# EAGLE board seven_seg (EAGLE 9.6.2), part 1 of 3
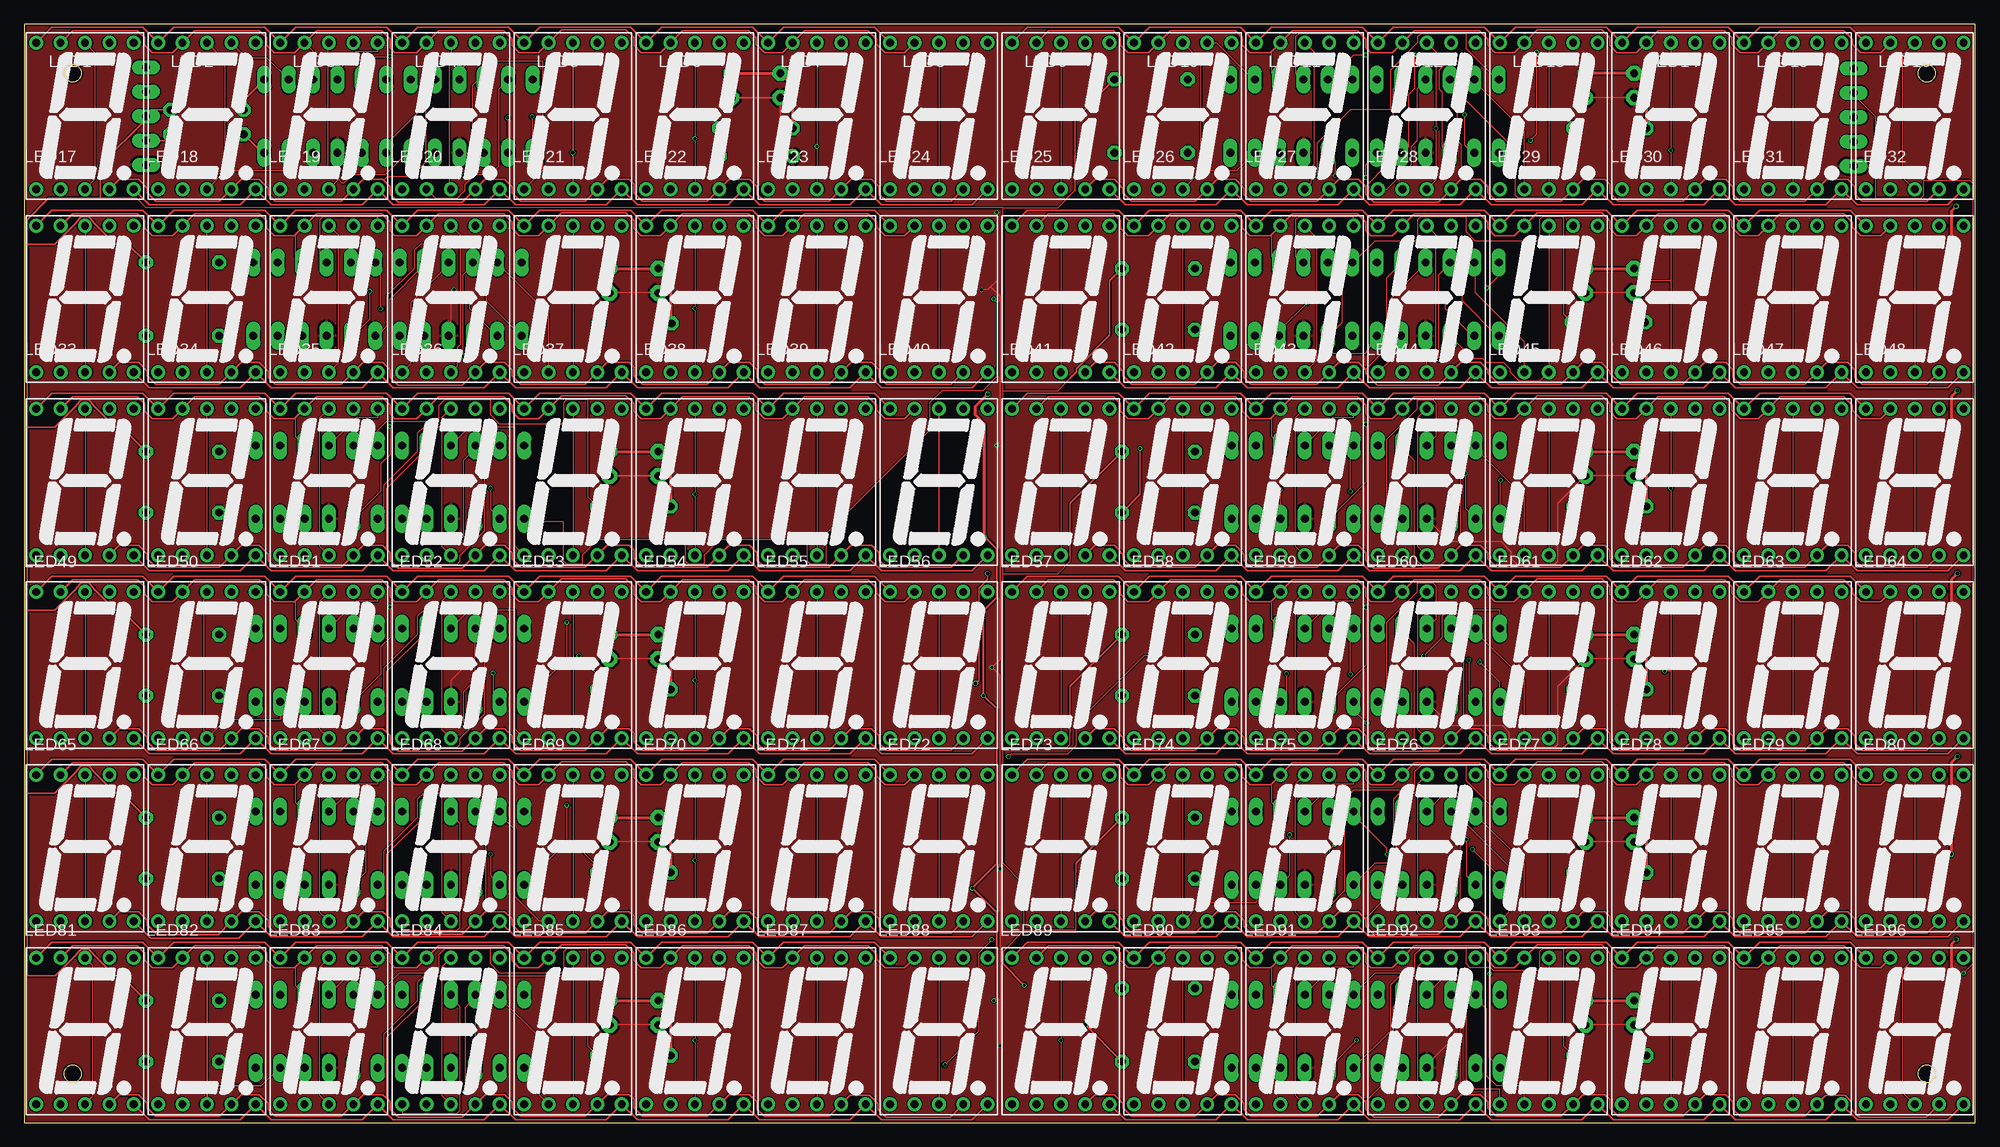
[diagram p0: board, top side]
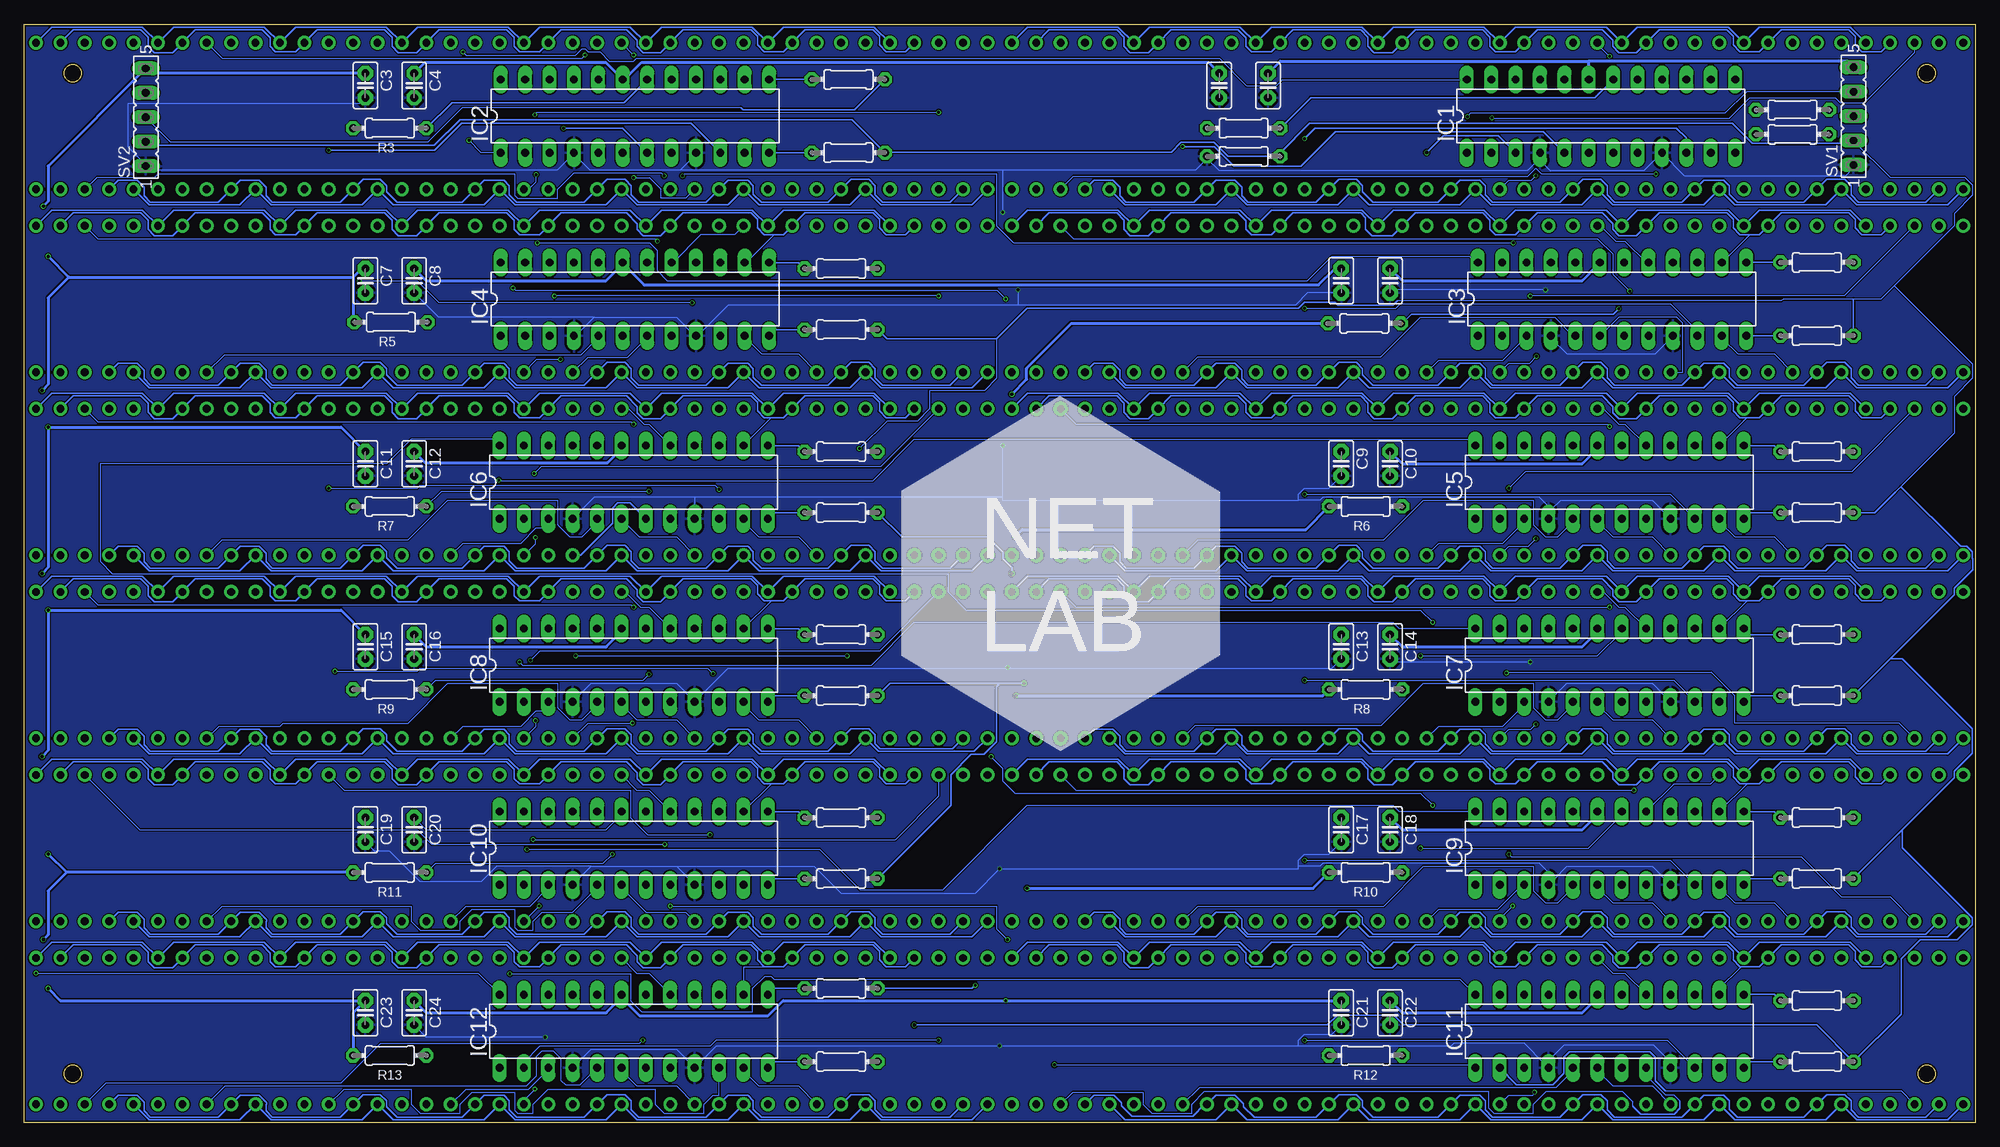
[diagram p1: board, bottom side, seen from below]

Size 203.18 x 114.35 mm. Coordinates in mm from the lower left corner, seen from the top.
Outline: 0,0 203.18,0 203.18,114.35 0,114.35 0,0
Outline: circle at 5.08,109.22 radius 0.89
Outline: circle at 5.08,5.08 radius 0.89
Outline: circle at 198.12,5.08 radius 0.89
Outline: circle at 198.12,109.22 radius 0.89
Copper layers (1*16): Top 0.035mm / dielectric 1.6mm / Bottom 0.035mm
Design rules "jlcpcb-2layers": minimum track width 5mil, minimum drill 0.3mm, track to track 5mil, track to pad 5mil, pad to pad 5mil, via to via 5mil, smd to smd 5mil, copper to edge 0.2mm, drill to drill 6mil, minimum pad ring 10mil, minimum via ring 3mil, stop-mask expansion 4mil, vias tented up to drill 0mil, thermal gap 10mil

## Footprints (pad centres in the part's own frame; a part is rotated, then mirrored left to right if it is on the bottom)
C2.5-2 = drill 0.813 pad 1.6 octagon: 1 -1.27,0; 2 1.27,0
DIL24-3 = drill 0.813 long: 1 -13.97,-3.81; 2 -11.43,-3.81; 3 -8.89,-3.81; 4 -6.35,-3.81; 5 -3.81,-3.81; 6 -1.27,-3.81; 7 1.27,-3.81; 8 3.81,-3.81; 9 6.35,-3.81; 10 8.89,-3.81; 11 11.43,-3.81; 12 13.97,-3.81; 13 13.97,3.81; 14 11.43,3.81; 15 8.89,3.81; 16 6.35,3.81; 17 3.81,3.81; 18 1.27,3.81; 19 -1.27,3.81; 20 -3.81,3.81; 21 -6.35,3.81; 22 -8.89,3.81; 23 -11.43,3.81; 24 -13.97,3.81
SA52-11 = drill 0.8: 1 -5.08,-7.62; 2 -2.54,-7.62; 3 0,-7.62; 4 2.54,-7.62; 5 5.08,-7.62; 6 5.08,7.62; 7 2.54,7.62; 8 0,7.62; 9 -2.54,7.62; 10 -5.08,7.62
0204/7 = drill 0.813 octagon: 1 -3.81,0; 2 3.81,0
FE05-1 = drill 0.813 long: 1 -5.08,0; 2 -2.54,0; 3 0,0; 4 2.54,0; 5 5.08,0

## Placement (x,y rotation side)
C1  10uF  [C2.5-2]  78.74,107.95 270 bottom
C2  100nF  [C2.5-2]  73.66,107.95 270 bottom
C3  10uF  [C2.5-2]  167.64,107.95 270 bottom
C4  100nF  [C2.5-2]  162.56,107.95 270 bottom
C5  10uF  [C2.5-2]  66.04,87.63 270 bottom
C6  100nF  [C2.5-2]  60.96,87.63 270 bottom
C7  10uF  [C2.5-2]  167.64,87.63 270 bottom
C8  100nF  [C2.5-2]  162.56,87.63 270 bottom
C9  10uF  [C2.5-2]  66.04,68.58 270 bottom
C10  100nF  [C2.5-2]  60.96,68.58 270 bottom
C11  10uF  [C2.5-2]  167.64,68.58 270 bottom
C12  100nF  [C2.5-2]  162.56,68.58 270 bottom
C13  10uF  [C2.5-2]  66.04,49.53 270 bottom
C14  100nF  [C2.5-2]  60.96,49.53 270 bottom
C15  10uF  [C2.5-2]  167.64,49.53 270 bottom
C16  100nF  [C2.5-2]  162.56,49.53 270 bottom
C17  10uF  [C2.5-2]  66.04,30.48 270 bottom
C18  100nF  [C2.5-2]  60.96,30.48 270 bottom
C19  10uF  [C2.5-2]  167.64,30.48 270 bottom
C20  100nF  [C2.5-2]  162.56,30.48 270 bottom
C21  10uF  [C2.5-2]  66.04,11.43 270 bottom
C22  100nF  [C2.5-2]  60.96,11.43 270 bottom
C23  10uF  [C2.5-2]  167.64,11.43 270 bottom
C24  100nF  [C2.5-2]  162.56,11.43 270 bottom
IC1  MAX7219CNG  [DIL24-3]  38.99,104.76 0 bottom
IC2  MAX7219CNG  [DIL24-3]  139.57,104.76 0 bottom
IC3  MAX7219CNG  [DIL24-3]  37.85,85.71 0 bottom
IC4  MAX7219CNG  [DIL24-3]  139.57,85.71 0 bottom
IC5  MAX7219CNG  [DIL24-3]  38.1,66.66 0 bottom
IC6  MAX7219CNG  [DIL24-3]  139.7,66.66 0 bottom
IC7  MAX7219CNG  [DIL24-3]  38.1,47.61 0 bottom
IC8  MAX7219CNG  [DIL24-3]  139.7,47.61 0 bottom
IC9  MAX7219CNG  [DIL24-3]  38.1,28.56 0 bottom
IC10  MAX7219CNG  [DIL24-3]  139.7,28.56 0 bottom
IC11  MAX7219CNG  [DIL24-3]  38.1,9.51 0 bottom
IC12  MAX7219CNG  [DIL24-3]  139.7,9.51 0 bottom
LED1  7-SEG_SA52-11  [SA52-11]  6.35,104.78 0 top
LED2  7-SEG_SA52-11  [SA52-11]  19.05,104.78 0 top
LED3  7-SEG_SA52-11  [SA52-11]  31.75,104.78 0 top
LED4  7-SEG_SA52-11  [SA52-11]  44.45,104.78 0 top
LED5  7-SEG_SA52-11  [SA52-11]  57.15,104.78 0 top
LED6  7-SEG_SA52-11  [SA52-11]  69.85,104.78 0 top
LED7  7-SEG_SA52-11  [SA52-11]  82.55,104.78 0 top
LED8  7-SEG_SA52-11  [SA52-11]  95.25,104.78 0 top
LED9  7-SEG_SA52-11  [SA52-11]  107.95,104.78 0 top
LED10  7-SEG_SA52-11  [SA52-11]  120.65,104.78 0 top
LED11  7-SEG_SA52-11  [SA52-11]  133.35,104.78 0 top
LED12  7-SEG_SA52-11  [SA52-11]  146.05,104.78 0 top
LED13  7-SEG_SA52-11  [SA52-11]  158.75,104.78 0 top
LED14  7-SEG_SA52-11  [SA52-11]  171.45,104.78 0 top
LED15  7-SEG_SA52-11  [SA52-11]  184.15,104.78 0 top
LED16  7-SEG_SA52-11  [SA52-11]  196.85,104.78 0 top
LED17  7-SEG_SA52-11  [SA52-11]  6.35,85.72 0 top
LED18  7-SEG_SA52-11  [SA52-11]  19.05,85.72 0 top
LED19  7-SEG_SA52-11  [SA52-11]  31.75,85.72 0 top
LED20  7-SEG_SA52-11  [SA52-11]  44.45,85.72 0 top
LED21  7-SEG_SA52-11  [SA52-11]  57.15,85.72 0 top
LED22  7-SEG_SA52-11  [SA52-11]  69.85,85.72 0 top
LED23  7-SEG_SA52-11  [SA52-11]  82.55,85.72 0 top
LED24  7-SEG_SA52-11  [SA52-11]  95.25,85.72 0 top
LED25  7-SEG_SA52-11  [SA52-11]  107.95,85.72 0 top
LED26  7-SEG_SA52-11  [SA52-11]  120.65,85.72 0 top
LED27  7-SEG_SA52-11  [SA52-11]  133.35,85.72 0 top
LED28  7-SEG_SA52-11  [SA52-11]  146.05,85.72 0 top
LED29  7-SEG_SA52-11  [SA52-11]  158.75,85.72 0 top
LED30  7-SEG_SA52-11  [SA52-11]  171.45,85.72 0 top
LED31  7-SEG_SA52-11  [SA52-11]  184.15,85.72 0 top
LED32  7-SEG_SA52-11  [SA52-11]  196.85,85.72 0 top
LED33  7-SEG_SA52-11  [SA52-11]  6.35,66.67 0 top
LED34  7-SEG_SA52-11  [SA52-11]  19.05,66.67 0 top
LED35  7-SEG_SA52-11  [SA52-11]  31.75,66.67 0 top
LED36  7-SEG_SA52-11  [SA52-11]  44.45,66.67 0 top
LED37  7-SEG_SA52-11  [SA52-11]  57.15,66.67 0 top
LED38  7-SEG_SA52-11  [SA52-11]  69.85,66.67 0 top
LED39  7-SEG_SA52-11  [SA52-11]  82.55,66.67 0 top
LED40  7-SEG_SA52-11  [SA52-11]  95.25,66.67 0 top
LED41  7-SEG_SA52-11  [SA52-11]  107.95,66.67 0 top
LED42  7-SEG_SA52-11  [SA52-11]  120.65,66.67 0 top
LED43  7-SEG_SA52-11  [SA52-11]  133.35,66.67 0 top
LED44  7-SEG_SA52-11  [SA52-11]  146.05,66.67 0 top
LED45  7-SEG_SA52-11  [SA52-11]  158.75,66.67 0 top
LED46  7-SEG_SA52-11  [SA52-11]  171.45,66.67 0 top
LED47  7-SEG_SA52-11  [SA52-11]  184.15,66.67 0 top
LED48  7-SEG_SA52-11  [SA52-11]  196.85,66.67 0 top
LED49  7-SEG_SA52-11  [SA52-11]  6.35,47.62 0 top
LED50  7-SEG_SA52-11  [SA52-11]  19.05,47.62 0 top
LED51  7-SEG_SA52-11  [SA52-11]  31.75,47.62 0 top
LED52  7-SEG_SA52-11  [SA52-11]  44.45,47.62 0 top
LED53  7-SEG_SA52-11  [SA52-11]  57.15,47.62 0 top
LED54  7-SEG_SA52-11  [SA52-11]  69.85,47.62 0 top
LED55  7-SEG_SA52-11  [SA52-11]  82.55,47.62 0 top
LED56  7-SEG_SA52-11  [SA52-11]  95.25,47.62 0 top
LED57  7-SEG_SA52-11  [SA52-11]  107.95,47.62 0 top
LED58  7-SEG_SA52-11  [SA52-11]  120.65,47.62 0 top
LED59  7-SEG_SA52-11  [SA52-11]  133.35,47.62 0 top
LED60  7-SEG_SA52-11  [SA52-11]  146.05,47.62 0 top
LED61  7-SEG_SA52-11  [SA52-11]  158.75,47.62 0 top
LED62  7-SEG_SA52-11  [SA52-11]  171.45,47.62 0 top
LED63  7-SEG_SA52-11  [SA52-11]  184.15,47.62 0 top
LED64  7-SEG_SA52-11  [SA52-11]  196.85,47.62 0 top
LED65  7-SEG_SA52-11  [SA52-11]  6.35,28.57 0 top
LED66  7-SEG_SA52-11  [SA52-11]  19.05,28.57 0 top
LED67  7-SEG_SA52-11  [SA52-11]  31.75,28.57 0 top
LED68  7-SEG_SA52-11  [SA52-11]  44.45,28.57 0 top
LED69  7-SEG_SA52-11  [SA52-11]  57.15,28.57 0 top
LED70  7-SEG_SA52-11  [SA52-11]  69.85,28.57 0 top
LED71  7-SEG_SA52-11  [SA52-11]  82.55,28.57 0 top
LED72  7-SEG_SA52-11  [SA52-11]  95.25,28.57 0 top
LED73  7-SEG_SA52-11  [SA52-11]  107.95,28.57 0 top
LED74  7-SEG_SA52-11  [SA52-11]  120.65,28.57 0 top
LED75  7-SEG_SA52-11  [SA52-11]  133.35,28.57 0 top
LED76  7-SEG_SA52-11  [SA52-11]  146.05,28.57 0 top
LED77  7-SEG_SA52-11  [SA52-11]  158.75,28.57 0 top
LED78  7-SEG_SA52-11  [SA52-11]  171.45,28.57 0 top
LED79  7-SEG_SA52-11  [SA52-11]  184.15,28.57 0 top
LED80  7-SEG_SA52-11  [SA52-11]  196.85,28.57 0 top
LED81  7-SEG_SA52-11  [SA52-11]  6.35,9.53 0 top
LED82  7-SEG_SA52-11  [SA52-11]  19.05,9.53 0 top
LED83  7-SEG_SA52-11  [SA52-11]  31.75,9.53 0 top
LED84  7-SEG_SA52-11  [SA52-11]  44.45,9.53 0 top
LED85  7-SEG_SA52-11  [SA52-11]  57.15,9.53 0 top
LED86  7-SEG_SA52-11  [SA52-11]  69.85,9.53 0 top
LED87  7-SEG_SA52-11  [SA52-11]  82.55,9.53 0 top
LED88  7-SEG_SA52-11  [SA52-11]  95.25,9.53 0 top
LED89  7-SEG_SA52-11  [SA52-11]  107.95,9.53 0 top
LED90  7-SEG_SA52-11  [SA52-11]  120.65,9.53 0 top
LED91  7-SEG_SA52-11  [SA52-11]  133.35,9.53 0 top
LED92  7-SEG_SA52-11  [SA52-11]  146.05,9.53 0 top
LED93  7-SEG_SA52-11  [SA52-11]  158.75,9.53 0 top
LED94  7-SEG_SA52-11  [SA52-11]  171.45,9.53 0 top
LED95  7-SEG_SA52-11  [SA52-11]  184.15,9.53 0 top
LED96  7-SEG_SA52-11  [SA52-11]  196.85,9.53 0 top
R1  12k  [0204/7]  76.2,103.5 0 bottom
R2  12k  [0204/7]  76.2,100.58 0 bottom
R3  12k  [0204/7]  165.1,103.5 0 bottom
R4  12k  [0204/7]  63.63,83.19 0 bottom
R5  12k  [0204/7]  164.97,83.31 0 bottom
R6  12k  [0204/7]  63.5,64.14 0 bottom
R7  12k  [0204/7]  165.1,64.14 0 bottom
R8  12k  [0204/7]  63.5,45.09 0 bottom
R9  12k  [0204/7]  165.1,45.09 0 bottom
R10  12k  [0204/7]  63.5,26.04 0 bottom
R11  12k  [0204/7]  165.1,26.04 0 bottom
R12  12k  [0204/7]  63.5,6.99 0 bottom
R13  12k  [0204/7]  165.1,6.99 0 bottom
R14  880  [0204/7]  19.05,105.41 0 bottom
R15  880  [0204/7]  19.05,102.87 0 bottom
R16  880  [0204/7]  117.35,108.58 0 bottom
R17  880  [0204/7]  117.35,100.97 0 bottom
R18  880  [0204/7]  16.51,89.53 0 bottom
R19  880  [0204/7]  16.51,81.92 0 bottom
R20  880  [0204/7]  118.11,88.9 0 bottom
R21  880  [0204/7]  118.11,82.55 0 bottom
R22  880  [0204/7]  16.51,69.85 0 bottom
R23  880  [0204/7]  16.51,63.5 0 bottom
R24  880  [0204/7]  118.11,69.85 0 bottom
R25  880  [0204/7]  118.11,63.5 0 bottom
R26  880  [0204/7]  16.51,50.8 0 bottom
R27  880  [0204/7]  16.51,44.45 0 bottom
R28  880  [0204/7]  118.11,50.8 0 bottom
R29  880  [0204/7]  118.11,44.45 0 bottom
R30  880  [0204/7]  16.51,31.75 0 bottom
R31  880  [0204/7]  16.51,25.4 0 bottom
R32  880  [0204/7]  118.11,31.75 0 bottom
R33  880  [0204/7]  118.11,25.4 0 bottom
R34  880  [0204/7]  16.51,12.7 0 bottom
R35  880  [0204/7]  16.51,6.35 0 bottom
R36  880  [0204/7]  118.11,13.97 0 bottom
R37  880  [0204/7]  118.11,6.35 0 bottom
SV1  [FE05-1]  12.7,104.76 90 bottom
SV2  [FE05-1]  190.5,104.65 90 bottom

## Library data of the parts
C1-C24 = capacitor-wima
IC1-IC12 = maxim; MF: MAXIM; MPN: MAX7219CNG; OC_FARNELL: 1523914; OC_NEWARK: 34C4018
LED1-LED96 = display-kingbright; OC_FARNELL: unknown; OC_NEWARK: unknown
R1-R37 = rcl; SPICEPREFIX: R
SV1 SV2 = con-lsta; OC_FARNELL: unknown; OC_NEWARK: unknown

## Nets
CLK: R14.2 R16.2 R18.2 R20.2 R22.2 R24.2 R26.2 R28.2 R30.2 R32.2 R34.2 R36.2 SV1.3 SV2.3
DIN: IC1.1 SV1.4
GND: C1.2 C2.2 C3.2 C4.2 C5.2 C6.2 C7.2 C8.2 C9.2 C10.2 C11.2 C12.2 C13.2 C14.2 C15.2 C16.2 C17.2 C18.2 C19.2 C20.2 C21.2 C22.2 C23.2 C24.2 IC1.4 IC1.9 IC2.4 IC2.9 IC3.4 IC3.9 IC4.4 IC4.9 IC5.4 IC5.9 IC6.4 IC6.9 IC7.4 IC7.9 IC8.4 IC8.9 IC9.4 IC9.9 IC10.4 IC10.9 IC11.4 IC11.9 IC12.4 IC12.9 R2.1 SV1.1 SV2.1
LOAD: R2.2 R15.2 R17.2 R19.2 R21.2 R23.2 R25.2 R27.2 R29.2 R31.2 R33.2 R35.2 R37.2 SV1.2 SV2.2
N$1: IC1.2 LED1.3 LED1.8
N$2: IC1.11 LED2.3 LED2.8
N$3: IC1.6 LED3.3 LED3.8
N$4: IC1.7 LED4.3 LED4.8
N$5: IC1.3 LED5.3 LED5.8
N$6: IC1.10 LED6.3 LED6.8
N$7: IC1.5 LED7.3 LED7.8
N$8: IC1.8 LED8.3 LED8.8
N$9: IC1.15 LED1.9 LED2.9 LED3.9 LED4.9 LED5.9 LED6.9 LED7.9 LED8.9
N$10: IC2.18 R3.2
N$11: IC2.22 LED9.5 LED10.5 LED11.5 LED12.5 LED13.5 LED14.5 LED15.5 LED16.5
N$12: IC1.13 R14.1
N$13: IC1.12 R15.1
N$14: IC2.13 R16.1
N$15: IC2.2 LED9.3 LED9.8
N$16: IC1.18 R1.2
N$17: IC1.14 LED1.7 LED2.7 LED3.7 LED4.7 LED5.7 LED6.7 LED7.7 LED8.7
N$18: IC1.22 LED1.5 LED2.5 LED3.5 LED4.5 LED5.5 LED6.5 LED7.5 LED8.5
N$19: IC1.16 LED1.6 LED2.6 LED3.6 LED4.6 LED5.6 LED6.6 LED7.6 LED8.6
N$20: IC1.20 LED1.4 LED2.4 LED3.4 LED4.4 LED5.4 LED6.4 LED7.4 LED8.4
N$21: IC1.23 LED1.2 LED2.2 LED3.2 LED4.2 LED5.2 LED6.2 LED7.2 LED8.2
N$22: IC1.21 LED1.1 LED2.1 LED3.1 LED4.1 LED5.1 LED6.1 LED7.1 LED8.1
N$23: IC2.11 LED10.3 LED10.8
N$24: IC1.17 LED1.10 LED2.10 LED3.10 LED4.10 LED5.10 LED6.10 LED7.10 LED8.10
N$25: IC2.6 LED11.3 LED11.8
N$26: IC2.7 LED12.3 LED12.8
N$27: IC2.3 LED13.3 LED13.8
N$28: IC2.10 LED14.3 LED14.8
N$29: IC2.5 LED15.3 LED15.8
N$30: IC2.8 LED16.3 LED16.8
N$31: IC2.14 LED9.7 LED10.7 LED11.7 LED12.7 LED13.7 LED14.7 LED15.7 LED16.7
N$32: IC2.16 LED9.6 LED10.6 LED11.6 LED12.6 LED13.6 LED14.6 LED15.6 LED16.6
N$33: IC2.20 LED9.4 LED10.4 LED11.4 LED12.4 LED13.4 LED14.4 LED15.4 LED16.4
N$34: IC2.23 LED9.2 LED10.2 LED11.2 LED12.2 LED13.2 LED14.2 LED15.2 LED16.2
N$35: IC2.21 LED9.1 LED10.1 LED11.1 LED12.1 LED13.1 LED14.1 LED15.1 LED16.1
N$36: IC2.17 LED9.10 LED10.10 LED11.10 LED12.10 LED13.10 LED14.10 LED15.10 LED16.10
N$37: IC2.15 LED9.9 LED10.9 LED11.9 LED12.9 LED13.9 LED14.9 LED15.9 LED16.9
N$38: IC2.24 IC3.1
N$39: IC10.3 LED77.3 LED77.8
N$40: IC2.12 R17.1
N$41: IC3.13 R18.1
N$42: IC1.24 IC2.1
N$43: IC3.12 R19.1
N$44: IC4.13 R20.1
N$45: IC4.12 R21.1
N$46: IC3.18 R4.2
N$47: IC3.22 LED17.5 LED18.5 LED19.5 LED20.5 LED21.5 LED22.5 LED23.5 LED24.5
N$48: IC3.2 LED17.3 LED17.8
N$49: IC3.11 LED18.3 LED18.8
N$50: IC3.6 LED19.3 LED19.8
N$51: IC3.7 LED20.3 LED20.8
N$52: IC3.3 LED21.3 LED21.8
N$53: IC3.10 LED22.3 LED22.8
N$54: IC3.5 LED23.3 LED23.8
N$55: IC3.8 LED24.3 LED24.8
N$56: IC3.14 LED17.7 LED18.7 LED19.7 LED20.7 LED21.7 LED22.7 LED23.7 LED24.7
N$57: IC3.16 LED17.6 LED18.6 LED19.6 LED20.6 LED21.6 LED22.6 LED23.6 LED24.6
N$58: IC3.20 LED17.4 LED18.4 LED19.4 LED20.4 LED21.4 LED22.4 LED23.4 LED24.4
N$59: IC3.23 LED17.2 LED18.2 LED19.2 LED20.2 LED21.2 LED22.2 LED23.2 LED24.2
N$60: IC3.21 LED17.1 LED18.1 LED19.1 LED20.1 LED21.1 LED22.1 LED23.1 LED24.1
N$61: IC3.17 LED17.10 LED18.10 LED19.10 LED20.10 LED21.10 LED22.10 LED23.10 LED24.10
N$62: IC3.15 LED17.9 LED18.9 LED19.9 LED20.9 LED21.9 LED22.9 LED23.9 LED24.9
N$63: IC5.13 R22.1
N$64: IC5.12 R23.1
N$65: IC6.13 R24.1
N$66: IC4.18 R5.2
N$67: IC3.24 IC4.1
N$68: IC4.22 LED25.5 LED26.5 LED27.5 LED28.5 LED29.5 LED30.5 LED31.5 LED32.5
N$69: IC4.2 LED25.3 LED25.8
N$70: IC4.11 LED26.3 LED26.8
N$71: IC4.6 LED27.3 LED27.8
N$72: IC4.7 LED28.3 LED28.8
N$73: IC4.3 LED29.3 LED29.8
N$74: IC4.10 LED30.3 LED30.8
N$75: IC4.5 LED31.3 LED31.8
N$76: IC4.8 LED32.3 LED32.8
N$77: IC4.14 LED25.7 LED26.7 LED27.7 LED28.7 LED29.7 LED30.7 LED31.7 LED32.7
N$78: IC4.16 LED25.6 LED26.6 LED27.6 LED28.6 LED29.6 LED30.6 LED31.6 LED32.6
N$79: IC4.20 LED25.4 LED26.4 LED27.4 LED28.4 LED29.4 LED30.4 LED31.4 LED32.4
N$80: IC4.23 LED25.2 LED26.2 LED27.2 LED28.2 LED29.2 LED30.2 LED31.2 LED32.2
N$81: IC4.21 LED25.1 LED26.1 LED27.1 LED28.1 LED29.1 LED30.1 LED31.1 LED32.1
N$82: IC4.17 LED25.10 LED26.10 LED27.10 LED28.10 LED29.10 LED30.10 LED31.10 LED32.10
N$83: IC4.15 LED25.9 LED26.9 LED27.9 LED28.9 LED29.9 LED30.9 LED31.9 LED32.9
N$84: IC6.12 R25.1
N$85: IC4.24 IC5.1
N$86: IC7.13 R26.1
N$87: IC7.12 R27.1
N$88: IC8.13 R28.1
N$89: IC8.12 R29.1
N$90: IC9.13 R30.1
N$91: IC5.18 R6.2
N$92: IC5.22 LED33.5 LED34.5 LED35.5 LED36.5 LED37.5 LED38.5 LED39.5 LED40.5
N$93: IC5.2 LED33.3 LED33.8
N$94: IC5.11 LED34.3 LED34.8
N$95: IC5.6 LED35.3 LED35.8
N$96: IC5.7 LED36.3 LED36.8
N$97: IC5.3 LED37.3 LED37.8
N$98: IC5.10 LED38.3 LED38.8
N$99: IC5.5 LED39.3 LED39.8
N$100: IC5.8 LED40.3 LED40.8
N$101: IC5.14 LED33.7 LED34.7 LED35.7 LED36.7 LED37.7 LED38.7 LED39.7 LED40.7
N$102: IC5.16 LED33.6 LED34.6 LED35.6 LED36.6 LED37.6 LED38.6 LED39.6 LED40.6
N$103: IC5.20 LED33.4 LED34.4 LED35.4 LED36.4 LED37.4 LED38.4 LED39.4 LED40.4
N$104: IC5.23 LED33.2 LED34.2 LED35.2 LED36.2 LED37.2 LED38.2 LED39.2 LED40.2
N$105: IC5.21 LED33.1 LED34.1 LED35.1 LED36.1 LED37.1 LED38.1 LED39.1 LED40.1
N$106: IC5.17 LED33.10 LED34.10 LED35.10 LED36.10 LED37.10 LED38.10 LED39.10 LED40.10
N$107: IC5.15 LED33.9 LED34.9 LED35.9 LED36.9 LED37.9 LED38.9 LED39.9 LED40.9
N$108: IC9.12 R31.1
N$109: IC5.24 IC6.1
N$110: IC10.13 R32.1
N$111: IC10.12 R33.1
N$112: IC11.13 R34.1
N$113: IC11.12 R35.1
N$114: IC12.13 R36.1
N$115: IC6.18 R7.2
N$116: IC6.22 LED41.5 LED42.5 LED43.5 LED44.5 LED45.5 LED46.5 LED47.5 LED48.5
N$117: IC6.2 LED41.3 LED41.8
N$118: IC6.11 LED42.3 LED42.8
N$119: IC6.6 LED43.3 LED43.8
N$120: IC6.7 LED44.3 LED44.8
N$121: IC6.3 LED45.3 LED45.8
N$122: IC6.10 LED46.3 LED46.8
N$123: IC6.5 LED47.3 LED47.8
N$124: IC6.8 LED48.3 LED48.8
N$125: IC6.14 LED41.7 LED42.7 LED43.7 LED44.7 LED45.7 LED46.7 LED47.7 LED48.7
N$126: IC6.16 LED41.6 LED42.6 LED43.6 LED44.6 LED45.6 LED46.6 LED47.6 LED48.6
N$127: IC6.20 LED41.4 LED42.4 LED43.4 LED44.4 LED45.4 LED46.4 LED47.4 LED48.4
N$128: IC6.23 LED41.2 LED42.2 LED43.2 LED44.2 LED45.2 LED46.2 LED47.2 LED48.2
N$129: IC6.21 LED41.1 LED42.1 LED43.1 LED44.1 LED45.1 LED46.1 LED47.1 LED48.1
N$130: IC6.17 LED41.10 LED42.10 LED43.10 LED44.10 LED45.10 LED46.10 LED47.10 LED48.10
N$131: IC6.15 LED41.9 LED42.9 LED43.9 LED44.9 LED45.9 LED46.9 LED47.9 LED48.9
N$132: IC12.12 R37.1
N$133: IC6.24 IC7.1
N$139: IC7.18 R8.2
N$140: IC7.22 LED49.5 LED50.5 LED51.5 LED52.5 LED53.5 LED54.5 LED55.5 LED56.5
N$141: IC7.2 LED49.3 LED49.8
N$142: IC7.11 LED50.3 LED50.8
N$143: IC7.6 LED51.3 LED51.8
N$144: IC7.7 LED52.3 LED52.8
N$145: IC7.3 LED53.3 LED53.8
N$146: IC7.10 LED54.3 LED54.8
N$147: IC7.5 LED55.3 LED55.8
N$148: IC7.8 LED56.3 LED56.8
N$149: IC7.14 LED49.7 LED50.7 LED51.7 LED52.7 LED53.7 LED54.7 LED55.7 LED56.7
N$150: IC7.16 LED49.6 LED50.6 LED51.6 LED52.6 LED53.6 LED54.6 LED55.6 LED56.6
N$151: IC7.20 LED49.4 LED50.4 LED51.4 LED52.4 LED53.4 LED54.4 LED55.4 LED56.4
N$152: IC7.23 LED49.2 LED50.2 LED51.2 LED52.2 LED53.2 LED54.2 LED55.2 LED56.2
N$153: IC7.21 LED49.1 LED50.1 LED51.1 LED52.1 LED53.1 LED54.1 LED55.1 LED56.1
N$154: IC7.17 LED49.10 LED50.10 LED51.10 LED52.10 LED53.10 LED54.10 LED55.10 LED56.10
N$155: IC7.15 LED49.9 LED50.9 LED51.9 LED52.9 LED53.9 LED54.9 LED55.9 LED56.9
N$157: IC7.24 IC8.1
N$163: IC8.18 R9.2
N$164: IC8.22 LED57.5 LED58.5 LED59.5 LED60.5 LED61.5 LED62.5 LED63.5 LED64.5
N$165: IC8.2 LED57.3 LED57.8
N$166: IC8.11 LED58.3 LED58.8
N$167: IC8.6 LED59.3 LED59.8
N$168: IC8.7 LED60.3 LED60.8
N$169: IC8.3 LED61.3 LED61.8
N$170: IC8.10 LED62.3 LED62.8
N$171: IC8.5 LED63.3 LED63.8
N$172: IC8.8 LED64.3 LED64.8
N$173: IC8.14 LED57.7 LED58.7 LED59.7 LED60.7 LED61.7 LED62.7 LED63.7 LED64.7
N$174: IC8.16 LED57.6 LED58.6 LED59.6 LED60.6 LED61.6 LED62.6 LED63.6 LED64.6
N$175: IC8.20 LED57.4 LED58.4 LED59.4 LED60.4 LED61.4 LED62.4 LED63.4 LED64.4
N$176: IC8.23 LED57.2 LED58.2 LED59.2 LED60.2 LED61.2 LED62.2 LED63.2 LED64.2
N$177: IC8.21 LED57.1 LED58.1 LED59.1 LED60.1 LED61.1 LED62.1 LED63.1 LED64.1
N$178: IC8.17 LED57.10 LED58.10 LED59.10 LED60.10 LED61.10 LED62.10 LED63.10 LED64.10
N$179: IC8.15 LED57.9 LED58.9 LED59.9 LED60.9 LED61.9 LED62.9 LED63.9 LED64.9
N$181: IC8.24 IC9.1
N$182: IC12.18 R13.2
N$187: IC9.18 R10.2
N$188: IC9.22 LED65.5 LED66.5 LED67.5 LED68.5 LED69.5 LED70.5 LED71.5 LED72.5
N$189: IC9.2 LED65.3 LED65.8
N$190: IC9.11 LED66.3 LED66.8
N$191: IC9.6 LED67.3 LED67.8
N$192: IC9.7 LED68.3 LED68.8
N$193: IC9.3 LED69.3 LED69.8
N$194: IC9.10 LED70.3 LED70.8
N$195: IC9.5 LED71.3 LED71.8
N$196: IC9.8 LED72.3 LED72.8
N$197: IC9.14 LED65.7 LED66.7 LED67.7 LED68.7 LED69.7 LED70.7 LED71.7 LED72.7
N$198: IC9.16 LED65.6 LED66.6 LED67.6 LED68.6 LED69.6 LED70.6 LED71.6 LED72.6
N$199: IC9.20 LED65.4 LED66.4 LED67.4 LED68.4 LED69.4 LED70.4 LED71.4 LED72.4
N$200: IC9.23 LED65.2 LED66.2 LED67.2 LED68.2 LED69.2 LED70.2 LED71.2 LED72.2
N$201: IC9.21 LED65.1 LED66.1 LED67.1 LED68.1 LED69.1 LED70.1 LED71.1 LED72.1
N$202: IC9.17 LED65.10 LED66.10 LED67.10 LED68.10 LED69.10 LED70.10 LED71.10 LED72.10
N$203: IC9.15 LED65.9 LED66.9 LED67.9 LED68.9 LED69.9 LED70.9 LED71.9 LED72.9
N$205: IC9.24 IC10.1
N$206: IC12.22 LED89.5 LED90.5 LED91.5 LED92.5 LED93.5 LED94.5 LED95.5 LED96.5
N$207: IC12.2 LED89.3 LED89.8
N$208: IC12.11 LED90.3 LED90.8
N$209: IC12.6 LED91.3 LED91.8
N$210: IC12.7 LED92.3 LED92.8
N$211: IC10.18 R11.2
N$212: IC10.22 LED73.5 LED74.5 LED75.5 LED76.5 LED77.5 LED78.5 LED79.5 LED80.5
N$213: IC10.2 LED73.3 LED73.8
N$214: IC10.11 LED74.3 LED74.8
N$215: IC10.6 LED75.3 LED75.8
N$216: IC10.7 LED76.3 LED76.8
N$218: IC10.10 LED78.3 LED78.8
N$219: IC10.5 LED79.3 LED79.8
N$220: IC10.8 LED80.3 LED80.8
N$221: IC10.14 LED73.7 LED74.7 LED75.7 LED76.7 LED77.7 LED78.7 LED79.7 LED80.7
N$222: IC10.16 LED73.6 LED74.6 LED75.6 LED76.6 LED77.6 LED78.6 LED79.6 LED80.6
N$223: IC10.20 LED73.4 LED74.4 LED75.4 LED76.4 LED77.4 LED78.4 LED79.4 LED80.4
N$224: IC10.23 LED73.2 LED74.2 LED75.2 LED76.2 LED77.2 LED78.2 LED79.2 LED80.2
N$225: IC10.21 LED73.1 LED74.1 LED75.1 LED76.1 LED77.1 LED78.1 LED79.1 LED80.1
N$226: IC10.17 LED73.10 LED74.10 LED75.10 LED76.10 LED77.10 LED78.10 LED79.10 LED80.10
N$227: IC10.15 LED73.9 LED74.9 LED75.9 LED76.9 LED77.9 LED78.9 LED79.9 LED80.9
N$229: IC10.24 IC11.1
N$230: IC12.3 LED93.3 LED93.8
N$231: IC12.10 LED94.3 LED94.8
N$232: IC12.5 LED95.3 LED95.8
N$233: IC12.8 LED96.3 LED96.8
N$234: IC12.14 LED89.7 LED90.7 LED91.7 LED92.7 LED93.7 LED94.7 LED95.7 LED96.7
N$235: IC11.18 R12.2
N$236: IC11.22 LED81.5 LED82.5 LED83.5 LED84.5 LED85.5 LED86.5 LED87.5 LED88.5
N$237: IC11.2 LED81.3 LED81.8
N$238: IC11.11 LED82.3 LED82.8
N$239: IC11.6 LED83.3 LED83.8
N$240: IC11.7 LED84.3 LED84.8
N$241: IC11.3 LED85.3 LED85.8
N$242: IC11.10 LED86.3 LED86.8
N$243: IC11.5 LED87.3 LED87.8
N$244: IC11.8 LED88.3 LED88.8
N$245: IC11.14 LED81.7 LED82.7 LED83.7 LED84.7 LED85.7 LED86.7 LED87.7 LED88.7
N$246: IC11.16 LED81.6 LED82.6 LED83.6 LED84.6 LED85.6 LED86.6 LED87.6 LED88.6
N$247: IC11.20 LED81.4 LED82.4 LED83.4 LED84.4 LED85.4 LED86.4 LED87.4 LED88.4
N$248: IC11.23 LED81.2 LED82.2 LED83.2 LED84.2 LED85.2 LED86.2 LED87.2 LED88.2
N$249: IC11.21 LED81.1 LED82.1 LED83.1 LED84.1 LED85.1 LED86.1 LED87.1 LED88.1
N$250: IC11.17 LED81.10 LED82.10 LED83.10 LED84.10 LED85.10 LED86.10 LED87.10 LED88.10
N$251: IC11.15 LED81.9 LED82.9 LED83.9 LED84.9 LED85.9 LED86.9 LED87.9 LED88.9
N$253: IC11.24 IC12.1
N$254: IC12.16 LED89.6 LED90.6 LED91.6 LED92.6 LED93.6 LED94.6 LED95.6 LED96.6
N$255: IC12.20 LED89.4 LED90.4 LED91.4 LED92.4 LED93.4 LED94.4 LED95.4 LED96.4
N$256: IC12.23 LED89.2 LED90.2 LED91.2 LED92.2 LED93.2 LED94.2 LED95.2 LED96.2
N$257: IC12.21 LED89.1 LED90.1 LED91.1 LED92.1 LED93.1 LED94.1 LED95.1 LED96.1
N$258: IC12.17 LED89.10 LED90.10 LED91.10 LED92.10 LED93.10 LED94.10 LED95.10 LED96.10
N$259: IC12.15 LED89.9 LED90.9 LED91.9 LED92.9 LED93.9 LED94.9 LED95.9 LED96.9
N$261: IC12.24 SV2.4
VCC: C1.1 C2.1 C3.1 C4.1 C5.1 C6.1 C7.1 C8.1 C9.1 C10.1 C11.1 C12.1 C13.1 C14.1 C15.1 C16.1 C17.1 C18.1 C19.1 C20.1 C21.1 C22.1 C23.1 C24.1 IC1.19 IC2.19 IC3.19 IC4.19 IC5.19 IC6.19 IC7.19 IC8.19 IC9.19 IC10.19 IC11.19 IC12.19 R1.1 R3.1 R4.1 R5.1 R6.1 R7.1 R8.1 R9.1 R10.1 R11.1 R12.1 R13.1 SV1.5 SV2.5

## Tracks (layer width: path | path; a pad name or v marks a point on that pad's centre or on a via)
CLK  (via drill 0.3)
  Top 0.127: 101.92,16.51 101.92,17.78 104.14,20 | 104.14,20 109.54,20 109.54,26.04 | 108.9,40.64 108.9,39.37 108.58,39.05 101.92,39.05 | 101.92,39.05 101.92,26.99 104.14,24.77 104.14,20 | 108.9,59.05 108.9,58.42 107.63,57.15 101.92,57.15 | 101.92,39.05 101.92,57.15 | 108.9,77.47 107.63,76.2 101.92,76.2 | 101.92,57.15 101.92,76.2 | 109.41,97.03 107.63,95.25 101.92,95.25 | 101.92,76.2 101.92,95.25 | 7.94,96.2 11.75,96.2 12.7,95.25 101.92,95.25
  Top 0.152: 0.32,91.44 0.32,93.98 2.54,96.2 7.94,96.2 7.94,99.69 12.7,104.46 SV1.3 13.35,105.41 R14.2 | 101.92,16.51 v104.14,14.29 | 109.41,97.03 109.41,104.46 R16.2 | 108.9,77.47 109.57,78.13 109.57,78.49 113.03,81.95 113.03,87.63 R20.2 | R24.2 108.9,64.45 108.9,59.05 | 108.9,40.64 108.9,45.4 R28.2 | R18.2 10.79,91.44 9.49,91.44 7.27,93.66 7.27,93.73 6.73,94.27 5.97,94.27 5.43,93.73 5.43,93.66 3.21,91.44 0.32,91.44 | 0.32,91.44 0.32,72.39 | 0.32,72.39 0.32,53.34 | 0.32,53.34 0.32,34.29 | 0.32,34.29 0.32,15.3 3.27,15.3 5.43,17.46 5.43,17.53 5.97,18.07 6.73,18.07 7.27,17.53 7.27,17.46 9.43,15.3 10.1,15.3 R34.2 | R30.2 10.16,34.29 9.49,34.29 7.27,36.51 7.27,36.58 6.73,37.12 5.97,37.12 5.43,36.58 5.43,36.51 3.21,34.29 0.32,34.29 | R26.2 10.16,53.34 9.49,53.34 7.27,55.56 7.27,55.63 6.73,56.17 5.97,56.17 5.43,55.63 5.43,55.56 3.21,53.34 0.32,53.34 | R22.2 10.16,72.39 9.49,72.39 7.27,74.61 7.27,74.68 6.73,75.22 5.97,75.22 5.43,74.68 5.43,74.61 3.21,72.39 0.32,72.39 | 109.54,26.04 109.54,26.99 R32.2
  Bottom 0.127: SV2.3 187.96,102.11 161.1,102.11 157.56,105.65 128.52,105.65
  Bottom 0.152: R16.2 116.7,105.42 128.3,105.42 128.52,105.65 | R36.2 104.46,13.97 v104.14,14.29
DIN  (via drill 0.3)
  Top 0.127: v52.9,104.71 52.96,104.65 IC1.1
  Bottom 0.127: SV1.4 23.83,107.3 26.03,105.09 52.51,105.09 v52.9,104.71
GND  (via drill 0.3)
  Top 0.127: C13.2 C14.2 | v46.35,47.94 44.45,46.04 IC7.4 | C15.2 C16.2 159.7,45.4 159.7,39.37 159.39,39.05 154.62,39.05 154.62,40.64 153.92,41.34 148.51,41.34 IC8.4 | C23.2 C24.2 | v148.91,8.89 146.05,6.03 IC12.4 | C21.2 C22.2 | C17.2 C18.2 | C19.2 C20.2 | v101.6,8 v101.6,26.42 101.6,46.55 v100.77,47.37 101.6,48.2 101.6,70.8 | C11.2 C12.2 159.7,64.45 159.7,58.42 159.39,58.1 155.45,58.1 154.81,58.74 154.81,59.42 153.8,60.44 148.46,60.44 IC6.4 | C7.2 C8.2 | C5.2 C6.2 | v44.77,86.68 44.45,86.36 44.45,81.92 IC3.4 | C1.2 78.74,101.92 80.01,100.65 R2.1 | C3.2 C4.2 | 100.65,87 101.28,87.63 v101.28,94.74 | 100.65,87 100.33,86.68 v99.69,86.68 | 101.6,70.8 v101.28,70.48 | 101.6,70.8 101.6,86.04 100.65,87
  Top 0.152: C9.2 C10.2 | C1.2 C2.2
  Bottom 0.127: IC7.9 31.75,43.81 33.66,45.72 42.55,45.72 44.45,43.81 IC7.4 | C14.2 60.64,47.94 v46.35,47.94 | 133.35,43.81 135.26,45.72 144.15,45.72 146.05,43.81 IC8.4 | C13.2 66.99,47.31 100.77,47.31 | 100.77,47.31 129.86,47.31 133.35,43.81 | 133.35,43.81 IC8.9 | 133.35,5.71 135.26,7.62 144.15,7.62 146.05,5.71 IC12.4 | C24.2 161.29,8.89 v148.91,8.89 | 44.83,6.1 42.8,8.13 33.53,8.13 31.75,6.35 IC11.9 | C21.2 66.99,9.21 69.85,9.21 70.48,8.57 70.48,7.94 | 70.48,7.94 54.61,7.94 54.29,8.26 46.99,8.26 44.83,6.1 | 44.83,6.1 44.45,5.71 IC11.4 | 133.35,5.71 131.13,7.94 101.6,7.94 | 70.48,7.94 101.6,7.94 | 133.35,5.71 IC12.9 | 43.81,25.4 44.45,24.77 IC9.4 43.81,25.4 | 43.81,25.4 42.55,26.67 33.66,26.67 31.75,24.77 IC9.9 | C17.2 67.31,27.94 69.85,27.94 70.48,27.3 70.48,26.67 | 70.48,26.67 70.48,26.42 v101.6,26.42 104.14,23.88 118.11,23.88 120.9,26.67 135.26,26.67 | 70.48,26.67 68.26,26.67 67.95,26.99 45.4,26.99 43.81,25.4 | 135.26,26.67 133.35,24.77 IC10.9 | 144.15,26.67 135.26,26.67 | 144.15,26.67 146.05,24.77 IC10.4 | C19.2 166.69,28.26 165.1,28.26 161.93,25.08 155.58,25.08 153.99,26.67 144.15,26.67 | v101.6,8 101.6,7.94 | v100.77,47.37 100.77,47.31 | 44.45,63.5 44.13,63.82 | 44.13,63.82 43.18,64.77 33.66,64.77 31.75,62.87 IC5.9 | C9.2 67.31,66.04 69.85,66.04 70.48,65.41 70.48,64.77 | 70.48,64.77 68.26,64.77 67.95,65.09 45.4,65.09 44.13,63.82 | 133.35,65.15 143.76,65.15 146.05,62.87 IC6.4 | 133.35,65.15 IC6.9 | 133.35,65.15 101.28,65.15 | 70.48,64.77 101.28,64.77 101.28,65.15 | 143.83,83.82 135.26,83.82 133.35,81.92 IC4.9 133.03,81.92 129.86,85.09 99.69,85.09 | 143.83,83.82 145.73,81.92 IC4.4 | C8.2 160.02,83.82 143.83,83.82
  Bottom 0.127: IC3.9 31.75,81.6 33.34,80.01 42.55,80.01 44.13,81.6 IC3.4 | C6.2 60.64,86.68 v44.77,86.68 | 99.69,85.09 70.8,85.09 69.53,86.36 C5.2 | IC1.9 32.66,100.93 | 32.66,100.93 30.29,98.55 13.53,98.55 12.7,99.38 SV1.1 | 45.47,100.27 44.26,99.06 34.53,99.06 32.66,100.93 | IC1.4 45.47,100.83 45.47,100.27 | 80.01,100.33 78.74,99.06 46.67,99.06 45.47,100.27 | 134.81,99.19 133.35,100.65 IC2.9 | 134.81,99.19 144.27,99.19 145.73,100.65 IC2.4 145.96,100.86 147.64,99.19 190.31,99.19 190.5,99.38 SV2.1 190.5,99.69 192.41,101.6 192.41,106.05 168.28,106.05 C3.2 | 80.01,100.33 81.15,99.19 101.28,99.19 | 134.81,99.19 101.28,99.19 | 80.01,100.33 R2.1 | v99.69,86.68 99.69,85.09 | 101.28,99.19 v101.28,94.74 | v101.28,70.48 101.28,65.15
  Bottom 0.152: IC5.4 44.45,63.5
  pour Top: -7.62,119.38 -7.62,-3.81 208.28,-3.81 208.28,119.38
  pour Bottom: -5.08,116.84 -5.08,-7.62 209.55,-7.62 210.82,-8.89 210.82,115.57 -3.81,115.57
LOAD  (via drill 0.3, 0.35)
  Top 0.152: R15.2 14.59,102.22 SV1.2 | v116.2,70.17 116.2,65.41 R25.2 | v100.33,57.15 100.33,56.55 99.41,55.63 99.41,46.07 v99.06,45.72 | v110.49,10.16 R37.2
  Bottom 0.127: SV2.2 190.12,101.73 | v116.2,70.17 113.35,73.03 110.17,73.03 108.9,74.3 108.9,76.2 103.19,76.2 101.92,77.47 101.92,81.6 | 8.45,87.12 2.22,93.34 2.22,94.61 0.32,96.52 0.32,97.6 1.13,98.41 8.89,98.41 SV1.2 | 8.45,87.12 9.84,85.72 12.7,85.72 20,85.72 20.19,85.53 60.2,85.53 | 8.32,65.66 7.78,66.2 2.22,71.75 2.22,75.56 0.32,77.47 0.32,78.99 8.45,87.12
  Bottom 0.152: 190.12,101.73 160.47,101.73 157.8,104.39 116.97,104.39 113.6,101.03 | 60.2,85.53 60.64,85.09 66.36,85.09 66.67,85.41 69.85,85.41 70.48,84.77 98.74,84.77 101.92,81.6 113.35,81.6 R21.2 | R17.2 113.6,101.03 | 113.6,101.03 83.73,101.03 82.73,102.03 79.28,102.03 77.84,100.58 R2.2 72.39,100.97 69.33,104.03 25.34,104.03 23.25,101.94 12.99,101.94 SV1.2 | 12.7,85.72 R19.2 | R23.2 10.48,63.5 8.32,65.66 | R25.2 111.76,60.96 102.87,60.96 101.25,59.34 101.25,58.67 100.33,57.75 v100.33,57.15 | 101.6,45.72 113.03,45.72 R29.2 | 101.6,45.72 v99.06,45.72 | 7.78,66.2 1.56,59.98 0.89,59.98 0.35,59.44 0.35,58.77 0.28,58.7 0.28,57.54 2.19,55.63 2.19,54.96 8.89,48.26 | 8.89,48.26 R27.2 | 8.89,48.26 7.62,48.26 0.35,40.99 0.35,38.42 2.19,36.58 2.19,35.91 7.62,30.48 | 7.62,30.48 R31.2 | 101.6,45.72 101.95,45.37 101.95,39.62 103.22,38.35 104.56,38.35 106.68,36.23 106.68,33.02 R33.2 | 7.62,30.48 7.62,28.61 0.35,21.34 0.35,20.57 1.87,19.05 5.75,19.05 7.75,17.05 7.75,11.3 R35.2 16.51,10.16 59.54,10.16 60.54,11.16 66.46,11.16 67.46,10.16 v110.49,10.16
N$1  (via drill 0.3)
  Top 0.127: LED1.8 7.37,111.38 7.37,98.17 LED1.3 | v50.36,104.58 50.42,104.52 IC1.2
  Bottom 0.127: v50.36,104.58 50.29,104.52 25.65,104.52 23.49,106.68 14.61,106.68 14.1,106.17 11.56,106.17 6.35,111.38 LED1.8
N$2
  Top 0.127: 20.95,99.06 LED2.3 | 20.95,99.06 27.56,99.06 IC1.11 | LED2.8 20.95,110.49 20.95,99.06
N$3
  Top 0.127: 32.77,98.17 LED3.3 | IC1.6 39.88,100.95 37.6,98.68 34.16,98.68 33.27,97.79 33.15,97.79 32.77,98.17 | LED3.8 31.69,112.33 31.69,99.25 32.77,98.17
N$4
  Top 0.127: LED4.3 44.26,97.35 44.26,110.43 | 44.26,110.43 44.26,110.49 42.61,110.49 41.59,109.47 41.59,105.73 37.72,101.85 IC1.7 | LED4.8 44.45,110.62 44.26,110.43
N$5  (via drill 0.35)
  Top 0.152: LED5.3 v57.15,100.97 LED5.8
  Bottom 0.152: v57.15,100.97 55.38,102.73 49.66,102.73 IC1.3
N$6  (via drill 0.3)
  Top 0.127: LED6.8 v69.85,102.42 LED6.3
  Bottom 0.152: v69.85,102.42 68.76,103.52 31.13,103.52 30.1,102.49 IC1.10
N$7  (via drill 0.3)
  Top 0.127: LED7.8 v82.55,101.6 LED7.3
  Bottom 0.152: v82.55,101.6 79.25,101.6 77.22,99.57 70.23,99.57 66.66,103.14 44.98,103.14 IC1.5
N$8  (via drill 0.3)
  Top 0.127: LED8.8 LED8.3 | v33.27,98.74 35.18,100.65 IC1.8
  Bottom 0.127: v33.27,98.74 45.21,98.74 45.78,99.31 46.61,98.49 93.92,98.49 LED8.3
N$9
  Top 0.127: IC1.15 30.1,111.51 LED3.9
  Top 0.152: LED8.9 91.69,111.38 89.66,111.38 88.77,112.27 88.77,112.78 87.88,113.67 81.28,113.67 LED7.9 78.99,111.38 77.09,111.38 76.2,112.27 76.2,112.9 75.44,113.67 68.58,113.67 LED6.9 66.29,111.38 64.26,111.38 63.5,112.14 63.5,112.9 62.66,113.74 55.96,113.74 LED5.9 53.59,111.38 51.56,111.38 50.8,112.14 50.8,112.78 49.91,113.67 43.18,113.67 LED4.9 40.89,111.38 38.61,111.38 38.1,111.89 38.1,112.78 37.21,113.67 30.48,113.67 LED3.9 28.19,111.38 26.03,111.38 25.27,112.14 25.27,112.9 24.51,113.67 17.78,113.67 LED2.9 15.49,111.38 13.34,111.38 12.57,112.14 12.57,112.9 11.81,113.67 5.08,113.67 LED1.9
N$10
  Bottom 0.152: IC2.18 140.7,106.17 158.62,106.17 R3.2
N$11  (via drill 0.3)
  Top 0.127: v149.86,98.68 149.67,98.87 149.67,101.79 149.23,102.23 149.23,107.63 148.59,108.27 IC2.22
  Top 0.152: LED9.5 114.66,95.53 124.1,95.53 LED10.5 127.36,95.53 136.8,95.53 LED11.5 140.06,95.53 149.5,95.53 LED12.5 152.76,95.53 162.2,95.53 LED13.5 165.46,95.53 174.9,95.53 LED14.5 178.16,95.53 187.6,95.53 LED15.5 190.86,95.53 200.3,95.53 LED16.5
  Bottom 0.127: v149.86,98.68 149.86,97.92 150.62,97.16 LED12.5
N$12
  Top 0.152: R14.1 22.86,106.41 IC1.13
N$13
  Top 0.152: R15.1 24.78,100.95 IC1.12
N$14
  Bottom 0.152: R16.1 125.59,108.58 IC2.13
N$15  (via drill 0.3)
  Top 0.127: LED9.8 v107.95,105.16 LED9.3 | v149.99,104.9 149.99,101.79 150.81,100.97 IC2.2
  Bottom 0.127: v149.99,104.9 149.73,105.16 v107.95,105.16
N$16
  Bottom 0.152: IC1.18 39.61,106.68 69.22,106.68 R1.2
N$17
  Top 0.127: IC1.14 27.56,108.58 25.34,110.81 23.18,110.81 LED2.7
  Bottom 0.152: LED8.7 96.44,113.74 89.41,113.74 88.65,112.98 88.65,112.01 88.01,111.38 86.11,111.38 LED7.7 83.74,113.74 76.79,113.74 75.95,112.9 75.95,112.01 75.4,111.47 73.31,111.47 LED6.7 71.04,113.74 64.01,113.74 63.25,112.98 63.25,112.01 62.61,111.38 60.71,111.38 LED5.7 58.34,113.74 51.31,113.74 50.55,112.98 50.55,112.01 50,111.47 47.91,111.47 LED4.7 45.64,113.74 38.86,113.74 37.75,112.64 37.75,112.01 37.12,111.38 35.31,111.38 LED3.7 32.94,113.74 25.88,113.74 25.22,113.09 25.22,112.18 24.51,111.47 22.51,111.47 LED2.7 20.24,113.74 13.18,113.74 12.52,113.09 12.52,112.18 11.81,111.47 9.81,111.47 LED1.7
N$18  (via drill 0.3)
  Top 0.127: v45.78,98.55 45.78,98.68 46.67,99.57 46.67,107.95 47.3,108.57 IC1.22
  Top 0.152: LED1.5 13.06,95.53 22.5,95.53 LED2.5 25.76,95.53 35.2,95.53 LED3.5 38.46,95.53 47.9,95.53 LED4.5 51.16,95.53 60.6,95.53 LED5.5 63.86,95.53 73.3,95.53 LED6.5 76.56,95.53 86,95.53 LED7.5 89.26,95.53 98.7,95.53 LED8.5
  Bottom 0.127: v45.78,98.55 46.23,98.11 48.58,98.11 LED4.5
N$19
  Top 0.127: LED3.6 36.83,111.44 34.61,111.44 32.64,109.47 IC1.16
  Bottom 0.152: LED8.6 98.7,114.02 89.26,114.02 LED7.6 86,114.02 76.56,114.02 LED6.6 73.3,114.02 63.86,114.02 LED5.6 60.6,114.02 51.16,114.02 LED4.6 47.9,114.02 38.46,114.02 LED3.6 35.2,114.02 25.76,114.02 LED2.6 22.5,114.02 13.06,114.02 LED1.6
N$20
  Top 0.127: IC1.20 42.21,108.57 41.85,108.2 41.85,100.01 40.32,98.49 37.85,98.49 37.43,98.08
  Top 0.152: LED1.4 9.91,98.17 11.94,98.17 12.83,97.28 12.83,96.77 13.72,95.89 20.32,95.89 LED2.4 22.61,98.17 24.51,98.17 25.4,97.28 25.4,96.65 26.16,95.89 33.02,95.89 LED3.4 35.31,98.17 37.34,98.17 37.43,98.08 38.1,97.41 38.1,96.65 38.94,95.81 45.64,95.81 LED4.4 48.01,98.17 50.04,98.17 50.8,97.41 50.8,96.77 51.69,95.89 58.42,95.89 LED5.4 60.71,98.17 62.99,98.17 63.5,97.66 63.5,96.77 64.39,95.89 71.12,95.89 LED6.4 73.41,98.17 75.56,98.17 76.33,97.41 76.33,96.65 77.09,95.89 83.82,95.89 LED7.4 86.11,98.17 88.27,98.17 89.03,97.41 89.03,96.65 89.79,95.89 96.52,95.89 LED8.4
N$21
  Top 0.127: LED4.2 42.86,96.2 45.09,96.2 45.91,97.03 45.91,97.66 46.91,98.67 48.51,98.67 49.4,99.56 49.4,107.56 IC1.23
  Bottom 0.152: LED1.2 5.16,95.81 12.19,95.81 12.95,96.57 12.95,97.54 13.59,98.17 15.49,98.17 LED2.2 17.86,95.81 24.81,95.81 25.65,96.65 25.65,97.54 26.2,98.08 28.29,98.08 LED3.2 30.56,95.81 37.59,95.81 38.35,96.57 38.35,97.54 38.99,98.17 40.89,98.17 LED4.2 43.26,95.81 50.29,95.81 51.05,96.57 51.05,97.54 51.6,98.08 53.69,98.08 LED5.2 55.96,95.81 62.74,95.81 63.85,96.91 63.85,97.54 64.48,98.17 66.29,98.17 LED6.2 68.66,95.81 75.72,95.81 76.38,96.46 76.38,97.37 77.09,98.08 79.09,98.08 LED7.2 81.36,95.81 88.42,95.81 89.08,96.46 89.08,97.37 89.79,98.08 91.79,98.08 LED8.2
N$22
  Top 0.127: LED5.1 54.04,99.12 54.04,110.49 46.35,110.49 45.34,109.47 IC1.21
  Bottom 0.152: LED1.1 2.9,95.53 12.34,95.53 LED2.1 15.6,95.53 25.04,95.53 LED3.1 28.3,95.53 37.74,95.53 LED4.1 41,95.53 50.44,95.53 LED5.1 53.7,95.53 63.14,95.53 LED6.1 66.4,95.53 75.84,95.53 LED7.1 79.1,95.53 88.54,95.53 LED8.1
N$23
  Top 0.127: 122.55,99.06 LED10.3 | 122.55,99.06 126.25,99.06 IC2.11 | LED10.8 122.55,110.49 122.55,99.06
N$24  (via drill 0.3)
  Top 0.127: v38.1,111 37.97,110.87 36.58,110.87 35.18,109.47 IC1.17
  Top 0.152: LED8.10 88.54,114.02 79.1,114.02 LED7.10 75.84,114.02 66.4,114.02 LED6.10 63.14,114.02 53.7,114.02 LED5.10 50.44,114.02 41,114.02 LED4.10 37.74,114.02 28.3,114.02 LED3.10 25.04,114.02 15.6,114.02 LED2.10 12.34,114.02 2.9,114.02 LED1.10
  Bottom 0.127: LED4.10 39.37,112.27 v38.1,111
N$25  (via drill 0.3)
  Top 0.127: LED11.3 133.99,97.79 133.99,99.38 134.3,99.69 134.3,111.44 LED11.8 | v139.7,98.36 139.7,99.69 140.65,100.65 IC2.6
  Bottom 0.127: v139.7,98.36 138.05,98.36 136.84,97.16 136.84,96.2 134.3,96.2 LED11.3
N$26  (via drill 0.3)
  Top 0.127: LED12.3 147,98.11 v147,103.5 147,111.44 LED12.8
  Bottom 0.152: IC2.7 140.86,103.5 v147,103.5
N$27
  Top 0.127: LED13.8 LED13.3 158.75,96.2 155.58,96.2 155.26,96.52 155.26,101.28 149.86,106.68 149.86,110.49 148.27,110.49 147.32,109.54 147.32,107.63 147.64,107.31 147.64,101.6 148.27,100.97 IC2.3
N$28  (via drill 0.3)
  Top 0.127: LED14.8 v171.45,101.22 LED14.3
  Bottom 0.152: v171.45,101.22 160.4,101.22 157.61,104.01 133.74,104.01 IC2.10
N$29  (via drill 0.3)
  Top 0.127: LED15.8 LED15.3 | v144.78,111.12 144.78,107.63 144.15,107 144.15,101.6 143.51,100.97 IC2.5
  Bottom 0.127: v144.78,111.12 145.1,110.81 182.56,110.81 LED15.8
N$30  (via drill 0.3)
  Top 0.127: LED16.8 195.58,111.12 195.58,98.42 LED16.3 | v136.53,98.55 136.53,100.01 135.89,100.65 IC2.8
  Bottom 0.127: v136.53,98.55 136.84,98.87 145.92,98.87 147.64,97.16 147.64,96.2 151.77,96.2 152.08,96.52 152.08,98.74 189.23,98.74 189.55,98.42 195.58,98.42 LED16.3
N$31
  Top 0.127: LED10.7 124.14,112.39 127.95,108.58 IC2.14
  Bottom 0.152: LED16.7 198.04,113.74 191.01,113.74 190.25,112.98 190.25,112.01 189.61,111.38 187.71,111.38 LED15.7 185.34,113.74 178.39,113.74 177.55,112.9 177.55,112.01 177,111.47 174.91,111.47 LED14.7 172.64,113.74 165.61,113.74 164.85,112.98 164.85,112.01 164.21,111.38 162.31,111.38 LED13.7 159.94,113.74 152.91,113.74 152.15,112.98 152.15,112.01 151.6,111.47 149.51,111.47 LED12.7 147.24,113.74 140.46,113.74 139.35,112.64 139.35,112.01 138.72,111.38 136.91,111.38 LED11.7 134.54,113.74 127.47,113.74 126.82,113.09 126.82,112.18 126.11,111.47 124.11,111.47 LED10.7 121.84,113.74 114.77,113.74 114.12,113.09 114.12,112.18 113.41,111.47 111.41,111.47 LED9.7
N$32
  Top 0.127: LED11.6 138.43,113.35 132.72,113.35 132.4,113.03 132.4,109.22 133.03,108.58 IC2.16
  Bottom 0.152: LED16.6 200.3,114.02 190.86,114.02 LED15.6 187.6,114.02 178.16,114.02 LED14.6 174.9,114.02 165.46,114.02 LED13.6 162.2,114.02 152.76,114.02 LED12.6 149.5,114.02 140.06,114.02 LED11.6 136.8,114.02 127.36,114.02 LED10.6 124.1,114.02 114.66,114.02 LED9.6
N$33
  Top 0.127: IC2.20 143.19,108.27 142.56,107.63 142.56,102.23 141.92,101.6 141.92,99.69 139.7,97.47 139.7,97.41
  Top 0.152: LED9.4 111.51,98.17 113.54,98.17 114.43,97.28 114.43,96.77 115.32,95.89 121.92,95.89 LED10.4 124.21,98.17 126.11,98.17 127,97.28 127,96.65 127.76,95.89 134.62,95.89 LED11.4 136.91,98.17 138.94,98.17 139.7,97.41 139.7,96.65 140.54,95.81 147.24,95.81 LED12.4 149.61,98.17 151.64,98.17 152.4,97.41 152.4,96.77 153.29,95.89 160.02,95.89 LED13.4 162.31,98.17 164.59,98.17 165.1,97.66 165.1,96.77 165.99,95.89 172.72,95.89 LED14.4 175.01,98.17 177.17,98.17 177.93,97.41 177.93,96.65 178.69,95.89 185.42,95.89 LED15.4 187.71,98.17 189.87,98.17 190.63,97.41 190.63,96.65 191.39,95.89 198.12,95.89 LED16.4
N$34
  Top 0.127: LED13.2 156.21,103.19 151.13,108.27 IC2.23
  Bottom 0.152: LED9.2 106.76,95.81 113.79,95.81 114.55,96.57 114.55,97.54 115.19,98.17 117.09,98.17 LED10.2 119.46,95.81 126.41,95.81 127.25,96.65 127.25,97.54 127.8,98.08 129.89,98.08 LED11.2 132.16,95.81 139.19,95.81 139.95,96.57 139.95,97.54 140.59,98.17 142.49,98.17 LED12.2 144.86,95.81 151.89,95.81 152.65,96.57 152.65,97.54 153.2,98.08 155.29,98.08 LED13.2 157.56,95.81 164.34,95.81 165.45,96.91 165.45,97.54 166.08,98.17 167.89,98.17 LED14.2 170.26,95.81 177.33,95.81 177.98,96.46 177.98,97.37 178.69,98.08 180.69,98.08 LED15.2 182.96,95.81 190.03,95.81 190.68,96.46 190.68,97.37 191.39,98.08 193.39,98.08 LED16.2
N$35
  Top 0.127: LED12.1 141.92,97.16 144.46,99.69 144.46,101.6 145.1,102.23 145.1,107.63 145.73,108.27 IC2.21
  Bottom 0.152: LED9.1 104.5,95.53 113.94,95.53 LED10.1 117.2,95.53 126.64,95.53 LED11.1 129.9,95.53 139.34,95.53 LED12.1 142.6,95.53 152.04,95.53 LED13.1 155.3,95.53 164.74,95.53 LED14.1 168,95.53 177.44,95.53 LED15.1 180.7,95.53 190.14,95.53 LED16.1
N$36  (via drill 0.3)
  Top 0.127: v139.7,111.12 138.43,111.12 135.89,108.58 IC2.17
  Top 0.152: LED16.10 190.14,114.02 180.7,114.02 LED15.10 177.44,114.02 168,114.02 LED14.10 164.74,114.02 155.3,114.02 LED13.10 152.04,114.02 142.6,114.02 LED12.10 139.34,114.02 129.9,114.02 LED11.10 126.64,114.02 117.2,114.02 LED10.10 113.94,114.02 104.5,114.02 LED9.10
  Bottom 0.127: LED12.10 v139.7,111.12
N$37
  Top 0.127: 129.86,111.44 129.86,109.22 130.49,108.58 IC2.15
  Top 0.152: LED16.9 193.29,111.38 191.26,111.38 190.37,112.27 190.37,112.78 189.48,113.67 182.88,113.67 LED15.9 180.59,111.38 178.69,111.38 177.8,112.27 177.8,112.9 177.04,113.67 170.18,113.67 LED14.9 167.89,111.38 165.86,111.38 165.1,112.14 165.1,112.9 164.26,113.74 157.56,113.74 LED13.9 155.19,111.38 153.16,111.38 152.4,112.14 152.4,112.78 151.51,113.67 144.78,113.67 LED12.9 142.49,111.38 140.21,111.38 139.7,111.89 139.7,112.78 138.81,113.67 132.08,113.67 LED11.9 129.86,111.44 129.79,111.38 127.64,111.38 126.87,112.14 126.87,112.9 126.11,113.67 119.38,113.67 LED10.9 117.09,111.38 114.94,111.38 114.17,112.14 114.17,112.9 113.41,113.67 106.68,113.67 LED9.9
N$38  (via drill 0.3)
  Top 0.127: v48.13,91.57 48.13,85.53 51.75,81.92 IC3.1 | v134.62,98.55 134.62,101.92 138.11,105.41 142.24,105.41 142.24,109.54 145.1,112.39 145.1,113.03 145.42,113.35 150.18,113.35 150.18,111.76 153.35,108.58 IC2.24
  Bottom 0.127: v48.13,91.57 100.14,91.57 101.92,93.34 101.92,98.74 134.43,98.74 v134.62,98.55
N$39
  Top 0.127: LED77.8 LED77.3
  Bottom 0.127: LED77.3 157.16,22.54 150.5,22.54 148.59,24.45 IC10.3
N$40
  Bottom 0.152: R17.1 125.59,100.97 IC2.12
N$41
  Bottom 0.152: R18.1 23.86,89.53 IC3.13
N$42  (via drill 0.3)
  Top 0.127: v156.84,102.23 157.48,102.87 v157.48,111.44
  Bottom 0.127: v157.48,111.44 157.16,111.12 145.73,111.12 145.1,111.76 144.78,111.76 144.46,111.44 143.19,111.44 142.24,110.49 139.7,110.49 139.38,110.81 78.74,110.81 75.88,107.95 72.76,107.95 72.14,108.57 IC1.24 | v156.84,102.23 155.58,100.97 153.67,100.97 IC2.1
N$43
  Bottom 0.152: R19.1 20.33,81.9 IC3.12
N$44
  Bottom 0.152: R20.1 122.54,89.52 IC4.13
N$45
  Bottom 0.152: R21.1 124.96,82.55 IC4.12
N$46  (via drill 0.3)
  Top 0.127: v37.15,84.71 37.15,88.9 36.83,89.22 IC3.18
  Bottom 0.127: 58.74,84.14 59.69,83.19 R4.2
  Bottom 0.152: v37.15,84.71 37.72,84.14 58.74,84.14
N$47  (via drill 0.3)
  Top 0.127: v45.72,79.76 45.72,88.27 46.67,89.22 IC3.22
  Top 0.152: LED17.5 13.06,76.48 22.5,76.48 LED18.5 25.76,76.48 35.2,76.48 LED19.5 38.46,76.48 47.9,76.48 LED20.5 51.16,76.48 60.6,76.48 LED21.5 63.86,76.48 73.3,76.48 LED22.5 76.56,76.48 86,76.48 LED23.5 89.26,76.48 98.7,76.48 LED24.5
  Bottom 0.127: v45.72,79.76 46.42,79.06 48.58,79.06 LED20.5
N$48  (via drill 0.3)
  Top 0.127: LED17.8 LED17.3 | v46.35,86.04 46.35,84.77 49.21,81.92 IC3.2
  Bottom 0.127: v46.35,86.04 13.65,86.04 LED17.8
N$49
  Top 0.127: LED18.3 LED18.8
  Bottom 0.127: LED18.3 20.95,80.01 24.77,80.01 26.35,81.6 IC3.11
N$50
  Top 0.127: LED19.3 32.7,79.06 32.7,92.39 LED19.8
  Bottom 0.127: LED19.3 30.48,78.11 30.48,83.19 31.12,83.82 37.15,83.82 39.05,81.92 IC3.6
N$51
  Top 0.127: LED20.3 45.09,78.74 45.09,80.64 45.4,80.96 45.4,91.44 | 45.4,91.44 45.4,92.39 LED20.8 | 45.4,91.44 41.27,91.44 40.64,90.81 40.64,88.9 37.78,86.04 37.78,82.87 36.83,81.92 IC3.7
N$52
  Top 0.127: LED21.8 LED21.3
  Bottom 0.127: LED21.3 55.88,79.38 49.21,79.38 46.99,81.6 IC3.3
N$53  (via drill 0.3)
  Top 0.127: LED22.8 v69.85,84.77 LED22.3
  Bottom 0.127: v69.85,84.77 60.32,84.77 59.88,85.22 31.75,85.22 28.96,82.42 IC3.10
N$54
  Top 0.127: LED23.8 LED23.3
  Bottom 0.127: LED23.3 80.96,79.69 61.91,79.69 57.78,83.82 43.81,83.82 41.91,81.92 IC3.5
N$55  (via drill 0.3)
  Top 0.127: LED24.8 LED24.3 | v36,86.55 36,83.63 34.29,81.92 IC3.8
  Bottom 0.127: v36,86.55 37.78,88.33 37.78,90.42 39.37,92.01 93.92,92.01 LED24.8
N$56
  Bottom 0.127: IC3.14 26.35,89.53 23.49,92.39 23.49,92.42
  Bottom 0.152: LED24.7 96.44,94.69 89.41,94.69 88.65,93.93 88.65,92.96 88.01,92.33 86.11,92.33 LED23.7 83.74,94.69 76.79,94.69 75.95,93.85 75.95,92.96 75.4,92.42 73.31,92.42 LED22.7 71.04,94.69 64.01,94.69 63.5,94.19 63.5,92.96 62.86,92.33 60.71,92.33 LED21.7 58.34,94.69 51.31,94.69 50.55,93.93 50.55,92.96 50,92.42 47.91,92.42 LED20.7 45.64,94.69 38.86,94.69 37.75,93.59 37.75,92.96 37.12,92.33 35.31,92.33 LED19.7 32.94,94.69 25.88,94.69 25.22,94.04 25.22,93.13 24.51,92.42 23.49,92.42 22.51,92.42 LED18.7 20.24,94.69 13.18,94.69 12.52,94.04 12.52,93.13 11.81,92.42 9.81,92.42 LED17.7
N$57
  Top 0.127: LED19.6 36.83,94.3 31.12,94.3 30.8,93.98 30.8,90.17 31.43,89.53 IC3.16
  Bottom 0.152: LED24.6 98.7,94.97 89.26,94.97 LED23.6 86,94.97 76.56,94.97 LED22.6 73.3,94.97 63.86,94.97 LED21.6 60.6,94.97 51.16,94.97 LED20.6 47.9,94.97 38.46,94.97 LED19.6 35.2,94.97 25.76,94.97 LED18.6 22.5,94.97 13.06,94.97 LED17.6
N$58
  Top 0.127: IC3.20 41.59,89.22 38.1,85.72 38.1,78.42 38.07,78.39
  Top 0.152: LED17.4 9.91,79.12 11.94,79.12 12.83,78.23 12.83,77.72 13.72,76.83 20.32,76.83 LED18.4 22.61,79.12 24.51,79.12 25.4,78.23 25.4,77.6 26.16,76.83 33.02,76.83 LED19.4 35.31,79.12 37.34,79.12 38.07,78.39 38.1,78.36 38.1,77.6 38.94,76.76 45.64,76.76 LED20.4 48.01,79.12 50.04,79.12 50.8,78.36 50.8,77.72 51.69,76.83 58.42,76.83 LED21.4 60.71,79.12 62.99,79.12 63.5,78.61 63.5,77.72 64.39,76.83 71.12,76.83 LED22.4 73.41,79.12 75.56,79.12 76.33,78.36 76.33,77.6 77.09,76.83 83.82,76.83 LED23.4 86.11,79.12 88.27,79.12 89.03,78.36 89.03,77.6 89.79,76.83 96.52,76.83 LED24.4
N$59
  Top 0.127: LED21.2 54.61,84.14 49.53,89.22 IC3.23
  Bottom 0.152: LED17.2 5.16,76.76 12.19,76.76 12.95,77.52 12.95,78.49 13.59,79.12 15.49,79.12 LED18.2 17.86,76.76 24.81,76.76 25.65,77.6 25.65,78.49 26.2,79.03 28.29,79.03 LED19.2 30.56,76.76 37.59,76.76 38.35,77.52 38.35,78.49 38.99,79.12 40.89,79.12 LED20.2 43.26,76.76 50.29,76.76 51.05,77.52 51.05,78.49 51.6,79.03 53.69,79.03 LED21.2 55.96,76.76 62.74,76.76 63.85,77.86 63.85,78.49 64.48,79.12 66.29,79.12 LED22.2 68.66,76.76 75.72,76.76 76.38,77.41 76.38,78.32 77.09,79.03 79.09,79.03 LED23.2 81.36,76.76 88.42,76.76 89.08,77.41 89.08,78.32 89.79,79.03 91.79,79.03 LED24.2
N$60
  Top 0.127: LED20.1 40.32,79.06 40.32,85.41 44.13,89.22 IC3.21
  Bottom 0.152: LED17.1 2.9,76.48 12.34,76.48 LED18.1 15.6,76.48 25.04,76.48 LED19.1 28.3,76.48 37.74,76.48 LED20.1 41,76.48 50.44,76.48 LED21.1 53.7,76.48 63.14,76.48 LED22.1 66.4,76.48 75.84,76.48 LED23.1 79.1,76.48 88.54,76.48 LED24.1
N$61
  Top 0.152: LED24.10 88.54,94.97 79.1,94.97 LED23.10 75.84,94.97 66.4,94.97 LED22.10 63.14,94.97 53.7,94.97 LED21.10 50.44,94.97 41,94.97 LED20.10 37.74,94.97 28.3,94.97 LED19.10 25.04,94.97 15.6,94.97 LED18.10 12.34,94.97 2.9,94.97 LED17.10
  Bottom 0.127: LED20.10 39.05,93.34 37.46,91.76 36.51,91.76 34.29,89.53 IC3.17
N$62
  Top 0.127: 28.26,92.39 28.26,90.17 28.89,89.53 IC3.15
  Top 0.152: LED24.9 91.69,92.33 89.66,92.33 88.77,93.22 88.77,93.73 87.88,94.61 81.28,94.61 LED23.9 78.99,92.33 77.09,92.33 76.2,93.22 76.2,93.85 75.44,94.61 68.58,94.61 LED22.9 66.29,92.33 64.26,92.33 63.5,93.09 63.5,93.85 62.66,94.69 55.96,94.69 LED21.9 53.59,92.33 51.56,92.33 50.8,93.09 50.8,93.73 49.91,94.61 43.18,94.61 LED20.9 40.89,92.33 38.61,92.33 38.1,92.84 38.1,93.73 37.21,94.61 30.48,94.61 LED19.9 28.26,92.39 28.19,92.33 26.03,92.33 25.27,93.09 25.27,93.85 24.51,94.61 17.78,94.61 LED18.9 15.49,92.33 13.34,92.33 12.57,93.09 12.57,93.85 11.81,94.61 5.08,94.61 LED17.9
N$63
  Bottom 0.152: R22.1 20.94,70.47 IC5.13
N$64
  Bottom 0.152: R23.1 23.48,63.5 IC5.12
N$65
  Bottom 0.152: R24.1 122.54,70.47 IC6.13
N$66
  Top 0.127: R5.2 160.34,84.14 160.34,94.3 158.12,94.3 157.8,93.98 157.8,91.76 151.13,91.76 150.18,92.71 150.18,94.3 145.42,94.3 145.1,93.98 145.1,91.76 140.65,91.76 138.43,89.53 IC4.18
N$67  (via drill 0.3)
  Top 0.127: v149.73,91.57 149.73,85.53 153.35,81.92 IC4.1
  Bottom 0.127: v149.73,91.57 138.05,91.57 137.29,90.81 137.29,88.71 136.21,87.63 69.53,87.63 66.99,90.17 52.7,90.17 52.07,89.53 IC3.24
N$68  (via drill 0.3)
  Top 0.127: v147.32,79.44 147.32,88.27 148.27,89.22 IC4.22
  Top 0.152: LED25.5 114.66,76.48 124.1,76.48 LED26.5 127.36,76.48 136.8,76.48 LED27.5 140.06,76.48 149.5,76.48 LED28.5 152.76,76.48 162.2,76.48 LED29.5 165.46,76.48 174.9,76.48 LED30.5 178.16,76.48 187.6,76.48 LED31.5 190.86,76.48 200.3,76.48 LED32.5
  Bottom 0.127: v147.32,79.44 149.8,79.44 LED28.5
N$69  (via drill 0.3)
  Top 0.127: LED25.8 v107.95,86.04 LED25.3 | v147.96,86.04 147.96,84.77 150.81,81.92 IC4.2
  Bottom 0.127: v107.95,86.04 v147.96,86.04
N$70
  Top 0.127: LED26.3 LED26.8
  Bottom 0.127: LED26.3 122.55,80.01 126.36,80.01 127.95,81.6 IC4.11
N$71
  Top 0.127: 134.62,79.38 135.26,80.01 139.66,80.01 IC4.6 | 134.62,79.38 LED27.3 | LED27.8 134.62,92.08 134.62,79.38
N$72
  Top 0.127: LED28.8 147,92.39 147,80.39 146.05,79.44 LED28.3
  Bottom 0.127: LED28.3 144.53,79.63 140.4,79.63 138.43,81.6 IC4.7
N$73
  Top 0.127: LED29.8 LED29.3 157.8,77.15 155.7,77.15 154.75,78.11 154.75,78.42 154.06,79.11 152.27,79.11 151.89,79.49 150.88,79.49 IC4.3
N$74  (via drill 0.3)
  Top 0.127: LED30.8 171.45,87.63 | 171.45,87.63 LED30.3 | IC4.10 130.68,82.42 v133.6,85.34 | 171.45,87.63 v168.28,87.63
  Bottom 0.127: v133.6,85.34 133.67,85.41 160.02,85.41 162.24,87.63 v168.28,87.63
N$75
  Top 0.127: LED31.8 LED31.3
  Bottom 0.127: LED31.3 182.31,79.95 145.16,79.95 143.51,81.6 IC4.5
N$76  (via drill 0.3)
  Top 0.127: LED32.8 LED32.3 | v137.22,91.76 137.22,83.25 135.89,81.92 IC4.8
  Bottom 0.127: v137.22,91.76 137.48,92.01 195.52,92.01 LED32.8
N$77
  Bottom 0.127: IC4.14 127.95,89.53 125.09,92.39 125.09,92.42
  Bottom 0.152: LED32.7 198.04,94.69 191.01,94.69 190.25,93.93 190.25,92.96 189.61,92.33 187.71,92.33 LED31.7 185.34,94.69 178.39,94.69 177.55,93.85 177.55,92.96 177,92.42 174.91,92.42 LED30.7 172.64,94.69 165.61,94.69 164.85,93.93 164.85,92.96 164.21,92.33 162.31,92.33 LED29.7 159.94,94.69 152.91,94.69 152.15,93.93 152.15,92.96 151.6,92.42 149.51,92.42 LED28.7 147.24,94.69 140.46,94.69 139.35,93.59 139.35,92.96 138.72,92.33 136.91,92.33 LED27.7 134.54,94.69 127.47,94.69 126.82,94.04 126.82,93.13 126.11,92.42 125.09,92.42 124.11,92.42 LED26.7 121.84,94.69 114.77,94.69 114.12,94.04 114.12,93.13 113.41,92.42 111.41,92.42 LED25.7
N$78
  Top 0.127: LED27.6 138.43,94.3 132.72,94.3 132.4,93.98 132.4,90.17 133.03,89.53 IC4.16